# EAGLE board CT_schematic (EAGLE 7.6.0)

Size 100 x 80 mm. Coordinates in mm from the lower left corner, seen from the top.
Outline: 0,0 100,0 100,80 0,80 0,0
Copper layers (1*16): Top 0.035mm / dielectric 1.5mm / Bottom 0.035mm
Design rules "default": minimum track width 10mil, minimum drill 24mil, track to track 8mil, track to pad 8mil, pad to pad 8mil, via to via 8mil, smd to smd 8mil, copper to edge 40mil, drill to drill 8mil, minimum pad ring 10mil, minimum via ring 8mil, stop-mask expansion 4mil, vias tented up to drill 0mil, thermal gap 10mil

## Footprints (pad centres in the part's own frame; a part is rotated, then mirrored left to right if it is on the bottom)
C0603 = smd 0.8 x 0.8: 1 -0.762,0; 2 0.762,0
C0402 = smd 0.5 x 0.5: 1 -0.508,0; 2 0.508,0
C1210 = smd 1.2 x 2.5: 1 -1.524,0; 2 1.524,0
C0805 = smd 1.2 x 1.3: 1 -1.016,0; 2 1.016,0
C1206 = smd 1.3 x 1.6: 1 -1.524,0; 2 1.524,0
DR1040 = smd 1.6 x 3.2: 1 -4.458,0; 2 4.458,0
R0603 = smd 0.8 x 0.8: 1 -0.762,0; 2 0.762,0
UFBGA132 = smd 0.32 x 0.32: A1 -2.75,2.75; A2 -2.25,2.75; A3 -1.75,2.75; A4 -1.25,2.75; A5 -0.75,2.75; A6 -0.25,2.75; A7 0.25,2.75; A8 0.75,2.75; A9 1.25,2.75; A10 1.75,2.75; A11 2.25,2.75; A12 2.75,2.75; B1 -2.75,2.25; B2 -2.25,2.25; B3 -1.75,2.25; B4 -1.25,2.25; B5 -0.75,2.25; B6 -0.25,2.25; B7 0.25,2.25; B8 0.75,2.25; B9 1.25,2.25; B10 1.75,2.25; B11 2.25,2.25; B12 2.75,2.25; C1 -2.75,1.75; C2 -2.25,1.75; C3 -1.75,1.75; C4 -1.25,1.75; C5 -0.75,1.75; C6 -0.25,1.75; C7 0.25,1.75; C8 0.75,1.75; C9 1.25,1.75; C10 1.75,1.75; C11 2.25,1.75; C12 2.75,1.75; D1 -2.75,1.25; D2 -2.25,1.25; D3 -1.75,1.25; D4 -1.25,1.25; D5 -0.75,1.25; D6 -0.25,1.25; D7 0.25,1.25; D8 0.75,1.25; D9 1.25,1.25; D10 1.75,1.25; D11 2.25,1.25; D12 2.75,1.25; E1 -2.75,0.75; E2 -2.25,0.75; E3 -1.75,0.75; E4 -1.25,0.75; E9 1.25,0.75; E10 1.75,0.75; E11 2.25,0.75; E12 2.75,0.75; F1 -2.75,0.25; F2 -2.25,0.25; F3 -1.75,0.25; F4 -1.25,0.25; F6 -0.25,0.25; F7 0.25,0.25; F9 1.25,0.25; F10 1.75,0.25; F11 2.25,0.25; F12 2.75,0.25; G1 -2.75,-0.25; G2 -2.25,-0.25; G3 -1.75,-0.25; G4 -1.25,-0.25; G6 -0.25,-0.25; G7 0.25,-0.25; G9 1.25,-0.25; G10 1.75,-0.25; G11 2.25,-0.25; G12 2.75,-0.25; H1 -2.75,-0.75; H2 -2.25,-0.75; H3 -1.75,-0.75; H4 -1.25,-0.75; H9 1.25,-0.75; H10 1.75,-0.75; H11 2.25,-0.75; H12 2.75,-0.75; J1 -2.75,-1.25; J2 -2.25,-1.25; J3 -1.75,-1.25; J4 -1.25,-1.25; J5 -0.75,-1.25; J6 -0.25,-1.25; J7 0.25,-1.25; J8 0.75,-1.25; J9 1.25,-1.25; J10 1.75,-1.25; J11 2.25,-1.25; J12 2.75,-1.25; K1 -2.75,-1.75; K2 -2.25,-1.75; K3 -1.75,-1.75; K4 -1.25,-1.75; K5 -0.75,-1.75; K6 -0.25,-1.75; K7 0.25,-1.75; K8 0.75,-1.75; K9 1.25,-1.75; K10 1.75,-1.75; K11 2.25,-1.75; K12 2.75,-1.75; L1 -2.75,-2.25; L2 -2.25,-2.25; L3 -1.75,-2.25; L4 -1.25,-2.25; L5 -0.75,-2.25; L6 -0.25,-2.25; L7 0.25,-2.25; L8 0.75,-2.25; L9 1.25,-2.25; L10 1.75,-2.25; L11 2.25,-2.25; L12 2.75,-2.25; M1 -2.75,-2.75; M2 -2.25,-2.75; M3 -1.75,-2.75; M4 -1.25,-2.75; M5 -0.75,-2.75; M6 -0.25,-2.75; M7 0.25,-2.75; M8 0.75,-2.75; M9 1.25,-2.75; M10 1.75,-2.75; M11 2.25,-2.75; M12 2.75,-2.75
VFBGA-63 = smd 0.4 x 0.4: A1 -3.6,4.4; A2 -2.8,4.4; A9 2.8,4.4; A10 3.6,4.4; B1 -3.6,3.6; B9 2.8,3.6; B10 3.6,3.6; C3 -2,2.8; C4 -1.2,2.8; C5 -0.4,2.8; C6 0.4,2.8; C7 1.2,2.8; C8 2,2.8; D3 -2,2; D4 -1.2,2; D5 -0.4,2; D6 0.4,2; D7 1.2,2; D8 2,2; E3 -2,1.2; E4 -1.2,1.2; E5 -0.4,1.2; E6 0.4,1.2; E7 1.2,1.2; E8 2,1.2; F3 -2,0.4; F4 -1.2,0.4; F5 -0.4,0.4; F6 0.4,0.4; F7 1.2,0.4; F8 2,0.4; G3 -2,-0.4; G4 -1.2,-0.4; G5 -0.4,-0.4; G6 0.4,-0.4; G7 1.2,-0.4; G8 2,-0.4; H3 -2,-1.2; H4 -1.2,-1.2; H5 -0.4,-1.2; H6 0.4,-1.2; H7 1.2,-1.2; H8 2,-1.2; J3 -2,-2; J4 -1.2,-2; J5 -0.4,-2; J6 0.4,-2; J7 1.2,-2; J8 2,-2; K3 -2,-2.8; K4 -1.2,-2.8; K5 -0.4,-2.8; K6 0.4,-2.8; K7 1.2,-2.8; K8 2,-2.8; L1 -3.6,-3.6; L2 -2.8,-3.6; L9 2.8,-3.6; L10 3.6,-3.6; M1 -3.6,-4.4; M2 -2.8,-4.4; M9 2.8,-4.4; M10 3.6,-4.4
TSSOP20-I = smd 0.4 x 1.35: 1 -2.925,-2.875; 2 -2.275,-2.875; 3 -1.625,-2.875; 4 -0.975,-2.875; 5 -0.325,-2.875; 6 0.325,-2.875; 7 0.975,-2.875; 8 1.625,-2.875; 9 2.275,-2.875; 10 2.925,-2.875; 11 2.925,2.875; 12 2.275,2.875; 13 1.625,2.875; 14 0.975,2.875; 15 0.325,2.875; 16 -0.325,2.875; 17 -0.975,2.875; 18 -1.625,2.875; 19 -2.275,2.875; 20 -2.925,2.875
182-009-MALE = drill 1.194 pad 1.524 octagon: 1 -5.537,10.923; 2 -2.769,10.923; 3 0,10.923; 4 2.769,10.923; 5 5.537,10.923; 6 -4.153,8.08; 7 -1.384,8.08; 8 1.384,8.08; 9 4.153,8.08 | hole 3.048: -12.446,9.501; 12.446,9.501
QFN65P400X400X100-17N = smd 1.016 x 0.356: 1 -1.803,0.965; 2 -1.803,0.33; 3 -1.803,-0.33; 4 -1.803,-0.965; 9 1.803,-0.965; 10 1.803,-0.33; 11 1.803,0.33; 12 1.803,0.965 | smd 0.356 x 1.016: 5 -0.965,-1.803; 6 -0.33,-1.803; 7 0.33,-1.803; 8 0.965,-1.803; 13 0.965,1.803; 14 0.33,1.803; 15 -0.33,1.803; 16 -0.965,1.803 | smd 2.108 x 2.108: 17 0,0
HTSS-105-01-G-D = drill 1 pad 1.8 square: 1 0,0 | drill 1 pad 1.8: 2 0,2.54; 3 2.54,0; 4 2.54,2.54; 5 5.08,0; 6 5.08,2.54; 7 7.62,0; 8 7.62,2.54; 9 10.16,0; 10 10.16,2.54
QFN-28 = smd 0.813 x 0.305: 1 -2.451,1.5; 2 -2.451,1; 3 -2.451,0.5; 4 -2.451,0; 5 -2.451,-0.5; 6 -2.451,-1; 7 -2.451,-1.5; 15 2.451,-1.5; 16 2.451,-1; 17 2.451,-0.5; 18 2.451,0; 19 2.451,0.5; 20 2.451,1; 21 2.451,1.5 | smd 0.305 x 0.813: 8 -1.5,-2.451; 9 -1,-2.451; 10 -0.5,-2.451; 11 0,-2.451; 12 0.5,-2.451; 13 1,-2.451; 14 1.5,-2.451; 22 1.5,2.451; 23 1,2.451; 24 0.5,2.451; 25 0,2.451; 26 -0.5,2.451; 27 -1,2.451; 28 -1.5,2.451 | smd 3.607 x 3.607: 29 0,0
SJ-43515TS-SMT-TR = smd 2.2 x 3: 1 0.6,-7.4; 4 3.4,-7.4 | smd 3 x 3: 2 12.8,-7.4; 5 17,-3 | smd 2 x 3: 3 5.3,0; 6 2.5,0 | drill 1.8: P$7 4.5,-3.69; P$8 11.54,-3.69
ABS07-32.768KHZ-7-T = smd 1.1 x 2.4: 1 -2.5,0; 2 0,0
ABLS-25.000MHZ-B2F-T = smd 5.6 x 2.8: 1 -3.81,0; 2 5.69,0
ASFL1 = smd 1.7 x 1.5: 1 -1.27,-1.1; 2 1.27,-1.1; 3 1.27,1.1; 4 -1.27,1.1
TSOT-23-5 = smd 1.3 x 0.62: 1 -1.31,0.95; 2 -1.31,0; 3 -1.31,-0.95; 4 1.31,-0.95; 5 1.31,0.95
SOIC-8_EP = smd 1.6 x 0.533: 1 -2.921,1.905; 2 -2.921,0.635; 3 -2.921,-0.635; 4 -2.921,-1.905; 5 2.921,-1.905; 6 2.921,-0.635; 7 2.921,0.635; 8 2.921,1.905 | smd 2.54 x 3.302: EPAD 0,0 | drill 0.406 pad 0.406: P$1 -0.508,0.635; P$2 0.381,0.635; P$3 -0.508,-0.635; P$4 0.381,-0.635
DFN8_2X3MC = smd 0.813 x 0.305: 1 -1.398,0.75; 2 -1.398,0.25; 3 -1.398,-0.25; 4 -1.398,-0.75; 5 1.398,-0.75; 6 1.398,-0.25; 7 1.398,0.25; 8 1.398,0.75 | smd 1.753 x 1.549: 9 0,0
JST-2-SMD = smd 1 x 4.6: 1 -1,-3.7; 2 1,-3.7 | smd 1.6 x 3.4: NC1 -3.4,1.5; NC2 3.4,1.5
FCI_10118193-0001LF = smd 0.4 x 1.35: 1 -1.3,2.675; 2 -0.65,2.675; 3 0,2.675; 4 0.65,2.675; 5 1.3,2.675 | smd 1.6 x 1.4: 6 -3.2,2.45; 7 3.2,2.45 | smd 1.9 x 1.9: 8 -1.2,0; 9 1.2,0 | hole 0.5: -3.3,0; 3.3,0
SON-6 = smd 0.55 x 0.3: 1 -0.355,0.5 | smd 0.52 x 0.3: 2 -0.37,0; 3 -0.37,-0.5; 4 0.37,-0.5; 5 0.37,0; 6 0.37,0.5
SW_4-1437565-2 = smd 1.4 x 2.1: 1 -2.23,4.55; 2 -2.23,-4.55; 3 2.23,4.55; 4 2.23,-4.55
LGM67K-G1J2-24-Z = smd 0.8 x 1.4: A -2,0; C 0,0
NC7SZ125M5X = smd 1.3 x 0.7: 1 -1.3,0.95; 2 -1.3,0; 3 -1.3,-0.95; 4 1.3,-0.95; 5 1.3,0.95

## Placement (x,y rotation side)
C1  1e-06  [C0603]  -52.07,81.28 0 top  (outside the outline)
C2  1e-07  [C0603]  -55.88,81.28 0 top  (outside the outline)
C3  1e-07  [C0603]  -59.69,81.28 0 top  (outside the outline)
C4  1e-07  [C0603]  -63.5,81.28 0 top  (outside the outline)
C5  1e-07  [C0603]  -67.31,81.28 0 top  (outside the outline)
C6  1e-07  [C0603]  -71.12,81.28 0 top  (outside the outline)
C7  1e-07  [C0603]  -74.93,81.28 0 top  (outside the outline)
C8  1e-07  [C0603]  -78.74,81.28 0 top  (outside the outline)
C9  1e-07  [C0603]  -82.55,81.28 0 top  (outside the outline)
C10  4.7e-06  [C0603]  -44.45,81.28 0 top  (outside the outline)
C11  1e-07  [C0603]  -86.36,81.28 0 top  (outside the outline)
C12  1e-07  [C0603]  -15.24,86.36 0 top  (outside the outline)
C13  1e-08  [C0603]  -19.05,86.36 0 top  (outside the outline)
C14  1e-06  [C0603]  -22.86,86.36 0 top  (outside the outline)
C15  1e-11  [C0402]  -57.15,86.36 0 top  (outside the outline)
C16  1e-11  [C0402]  -60.96,86.36 0 top  (outside the outline)
C17  1e-11  [C0402]  -64.77,86.36 0 top  (outside the outline)
C18  1e-11  [C0402]  -68.58,86.36 0 top  (outside the outline)
C19  1e-07  [C0402]  -72.39,86.36 0 top  (outside the outline)
C20  1e-07  [C0402]  -76.2,86.36 0 top  (outside the outline)
C21  1e-07  [C0402]  -80.01,86.36 0 top  (outside the outline)
C22  1e-07  [C0402]  -83.82,86.36 0 top  (outside the outline)
C23  2.2e-06  [C0603]  -48.26,81.28 0 top  (outside the outline)
C24  1e-07  [C0402]  -87.63,86.36 0 top  (outside the outline)
C25  1e-07  [C0402]  -15.24,91.44 0 top  (outside the outline)
C26  1e-07  [C0402]  -19.05,91.44 0 top  (outside the outline)
C27  1e-07  [C0402]  -22.86,91.44 0 top  (outside the outline)
C28  1e-07  [C0402]  -26.67,91.44 0 top  (outside the outline)
C29  1e-07  [C0402]  -30.48,91.44 0 top  (outside the outline)
C30  1e-07  [C0402]  -34.29,91.44 0 top  (outside the outline)
C31  1e-07  [C0402]  -38.1,91.44 0 top  (outside the outline)
C32  1e-06  [C0603]  -26.67,86.36 0 top  (outside the outline)
C33  2.2e-05  [C1210]  -66.04,62.23 0 top  (outside the outline)
C34  2.2e-05  [C1210]  -72.39,62.23 0 top  (outside the outline)
C35  1e-09  [C0402]  -41.91,91.44 0 top  (outside the outline)
C36  1e-09  [C0402]  -45.72,91.44 0 top  (outside the outline)
C37  1e-07  [C0402]  -49.53,91.44 0 top  (outside the outline)
C38  1e-07  [C0402]  -53.34,91.44 0 top  (outside the outline)
C39  1e-07  [C0402]  -57.15,91.44 0 top  (outside the outline)
C40  1e-07  [C0402]  -60.96,91.44 0 top  (outside the outline)
C41  1e-07  [C0402]  -64.77,91.44 0 top  (outside the outline)
C42  1e-05  [C0805]  -46.99,69.85 0 top  (outside the outline)
C43  1e-05  [C0805]  -52.07,69.85 0 top  (outside the outline)
C44  1e-05  [C0805]  -57.15,69.85 0 top  (outside the outline)
C45  1e-05  [C0805]  -62.23,69.85 0 top  (outside the outline)
C46  1e-05  [C0805]  -67.31,69.85 0 top  (outside the outline)
C47  1e-08  [C0402]  -68.58,91.44 0 top  (outside the outline)
C48  1e-05  [C0805]  -72.39,69.85 0 top  (outside the outline)
C49  1e-05  [C0805]  -77.47,69.85 0 top  (outside the outline)
C50  1e-05  [C1210]  -78.74,62.23 0 top  (outside the outline)
C51  1e-05  [C1210]  -85.09,62.23 0 top  (outside the outline)
C52  1e-05  [C1210]  -16.51,69.85 0 top  (outside the outline)
C53  1e-05  [C1210]  -22.86,69.85 0 top  (outside the outline)
C54  1e-07  [C0402]  -72.39,91.44 0 top  (outside the outline)
C55  1e-05  [C1206]  -29.21,69.85 0 top  (outside the outline)
C56  1e-05  [C1206]  -35.56,69.85 0 top  (outside the outline)
C57  1e-08  [C0402]  -76.2,91.44 0 top  (outside the outline)
I1  7e-06  [DR1040]  -69.85,41.91 0 top  (outside the outline)
R2  1000.0  [R0603]  -30.48,86.36 0 top  (outside the outline)
R4  4700.0  [R0603]  -34.29,86.36 0 top  (outside the outline)
R6  2200.0  [R0603]  -38.1,86.36 0 top  (outside the outline)
R7  10000.0  [R0603]  -44.45,76.2 0 top  (outside the outline)
R8  10000.0  [R0603]  -49.53,76.2 0 top  (outside the outline)
R9  10000.0  [R0603]  -54.61,76.2 0 top  (outside the outline)
R10  10000.0  [R0603]  -59.69,76.2 0 top  (outside the outline)
R11  10000.0  [R0603]  -64.77,76.2 0 top  (outside the outline)
R12  10000.0  [R0603]  -69.85,76.2 0 top  (outside the outline)
R13  10000.0  [R0603]  -74.93,76.2 0 top  (outside the outline)
R14  10000.0  [R0603]  -80.01,76.2 0 top  (outside the outline)
R15  47.0  [R0603]  -41.91,86.36 0 top  (outside the outline)
R16  47000.0  [R0603]  -85.09,76.2 0 top  (outside the outline)
R17  47000.0  [R0603]  -15.24,81.28 0 top  (outside the outline)
R18  47000.0  [R0603]  -20.32,81.28 0 top  (outside the outline)
R19  680.0  [R0603]  -45.72,86.36 0 top  (outside the outline)
R20  490000.0  [R0603]  -29.21,76.2 0 top  (outside the outline)
R21  1000000.0  [R0603]  -24.13,76.2 0 top  (outside the outline)
R22  4031.5447154472  [R0603]  -19.05,76.2 0 top  (outside the outline)
R23  2200.0  [R0603]  -49.53,86.36 0 top  (outside the outline)
R24  10000.0  [R0603]  -25.4,81.28 0 top  (outside the outline)
R25  10000.0  [R0603]  -30.48,81.28 0 top  (outside the outline)
R26  82000.0  [R0603]  -35.56,81.28 0 top  (outside the outline)
R27  300000.0  [R0603]  -34.29,76.2 0 top  (outside the outline)
R28  120000.0  [R0603]  -39.37,76.2 0 top  (outside the outline)
R29  2000.0  [R0603]  -53.34,86.36 0 top  (outside the outline)
R30  10000.0  [R0603]  -40.64,81.28 0 top  (outside the outline)
U1  STM32L471QGI6  [UFBGA132]  -44.45,41.91 0 top  (outside the outline)
U2  mt29f4g08abbdah4  [VFBGA-63]  -73.66,27.94 0 top  (outside the outline)
U3  SP3203ECY-L/TR  [TSSOP20-I]  -59.69,41.91 0 top  (outside the outline)
U4  182-009-113R531  [182-009-MALE]  -36.83,6.35 0 top  (outside the outline)
U5  TSC2013QRSARQ1  [QFN65P400X400X100-17N]  -74.93,7.62 0 top  (outside the outline)
U6  HTSS-105-01-G-D  [HTSS-105-01-G-D]  -27.94,53.34 0 top  (outside the outline)
U7  WM8731CLSEFL  [QFN-28]  -58.42,63.5 0 top  (outside the outline)
U8  SJ-43515TS-SMT-TR  [SJ-43515TS-SMT-TR]  -39.37,31.75 0 top  (outside the outline)
U9  SJ-43515TS-SMT-TR  [SJ-43515TS-SMT-TR]  -67.31,31.75 0 top  (outside the outline)
U10  ABS07-32.768KHZ-7-T  [ABS07-32.768KHZ-7-T]  -27.94,63.5 0 top  (outside the outline)
U11  ABLS-25.000MHZ-B2F-T  [ABLS-25.000MHZ-B2F-T]  -77.47,53.34 0 top  (outside the outline)
U12  ASFL1-12.288MHZ-EC-T  [ASFL1]  -49.53,53.34 0 top  (outside the outline)
U13  ltc3406es5  [TSOT-23-5]  -82.55,68.58 0 top  (outside the outline)
U14  MIC5234YME  [SOIC-8_EP]  -36.83,62.23 0 top  (outside the outline)
U15  MCP73831T-2ACI/MC  [DFN8_2X3MC]  -85.09,90.17 0 top  (outside the outline)
U16  S2B-PH-SM4-TB(LF)(SN)  [JST-2-SMD]  -85.09,43.18 0 top  (outside the outline)
U17  10118193-0001LF  [FCI_10118193-0001LF]  -58.42,53.34 0 top  (outside the outline)
U18  TPS3895ADRYR  [SON-6]  -78.74,90.17 0 top  (outside the outline)
U19  4-1437565-2  [SW_4-1437565-2]  -27.94,43.18 0 top  (outside the outline)
U20  Q65110A2395  [LGM67K-G1J2-24-Z]  -45.72,63.5 0 top  (outside the outline)
U21  nc7sz125m5x  [NC7SZ125M5X]  -40.64,69.85 0 top  (outside the outline)

## Library data of the parts
C1-C57 I1 R2 R4 R6-R30 U1-U21 = circuit_tree

## Nets
CLK_CRYSTAL_U1_D1: C15.1 U1.D1 U10.1
CLK_CRYSTAL_U1_E1: C16.1 U1.E1 U10.2
CLK_CRYSTAL_U1_F1: C17.1 U1.F1 U11.1
CLK_CRYSTAL_U1_G1: C18.1 U1.G1 U11.2
CLK_U7_1: U7.1 U12.3
GND: C1.2 C2.2 C3.2 C4.2 C5.2 C6.2 C7.2 C8.2 C9.2 C10.2 C11.2 C12.2 C13.2 C14.2 C15.2 C16.2 C17.2 C18.2 C19.2 C20.2 C21.2 C22.2 C23.2 C24.2 C25.2 C28.2 C29.2 C36.2 C37.2 C38.2 C39.2 C40.2 C41.2 C42.2 C43.2 C44.2 C45.2 C46.2 C47.2 C48.2 C49.1 C49.2 C50.2 C51.2 C52.2 C53.2 C54.2 C55.2 C56.2 C57.2 R2.2 R7.2 R16.2 R17.2 R18.2 R20.2 R23.2 R26.2 R28.2 R29.2 U1.D3 U1.E3 U1.F2 U1.F6 U1.F7 U1.F11 U1.F12 U1.J1 U2.C5 U2.F7 U2.K3 U2.K8 U3.18 U4.5 U5.17 U6.9 U7.4 U7.15 U7.19 U7.25 U7.26 U7.29 U8.1 U9.1 U12.2 U13.2 U14.7 U14.EPAD U15.6 U15.9 U16.2 U17.5 U17.6 U17.7 U17.8 U17.9 U18.2 U20.C U21.1 U21.3
INPUT_USBPOWER_5V: C55.1 R30.2 U15.1 U15.2 U17.1
NET_U1_A4: R7.1 U1.A4
NET_U1_B3: R6.1 U1.B3 U5.1
NET_U1_H2: R4.1 U1.H2 U21.4
NET_U1_M11: U20.A
NET_U1_M12: U19.3 U19.4
NET_U2_C3: R12.1 U2.C3
NET_U3_1: C26.1 U3.1
NET_U3_2: C28.1 U3.2
NET_U3_3: C26.2 U3.3
NET_U3_4: C27.1 U3.4
NET_U3_5: C27.2 U3.5
NET_U3_6: C29.1 U3.6
NET_U3_20: U3.20
NET_U4_2: U3.14 U4.2
NET_U4_3: U3.17 U4.3
NET_U4_7: U3.13 U4.7
NET_U4_8: U3.16 U4.8
NET_U5_4: R14.1 U5.4
NET_U5_5: R13.1 U5.5
NET_U5_9: C30.2 C31.2 C32.2 R15.2 U5.9
NET_U5_15: R15.1 U5.8 U5.15
NET_U6_3: U5.12 U6.3
NET_U6_4: U5.14 U6.4
NET_U6_5: U5.11 U6.5
NET_U6_6: U5.13 U6.6
NET_U7_9: U7.9
NET_U7_20: C41.1 C46.1 U7.20
NET_U8_2: C34.1 R17.1 U8.2
NET_U8_5: C33.1 R16.1 U8.5
NET_U8_13: C33.2
NET_U8_14: C34.2
NET_U9_5: C35.1 C36.1 R18.1 R19.1 U9.5
NET_U9_21: R19.2
NET_U9_22: C35.2
NET_U13_1: U13.1
NET_U13_3: I1.1 U13.3
NET_U13_5: R20.1 R21.1 U13.5
NET_U13_ATNET_3: I1.2 R21.2
NET_U14_4: R22.2 R23.1 U14.4
NET_U15_5: R30.1 U15.5
NET_U15_8: R29.1 U15.8
NET_U18_1: R25.1 R26.1 U18.1
NET_U18_3: R27.2 R28.1 U18.3
NET_U18_4: R24.1 U18.4 U21.2
NET_U19_1: R2.1 U19.1 U19.2
PROC_FMC_A16: U1.J11 U2.D5
PROC_FMC_A17: U1.J10 U2.C4
PROC_FMC_D0: U1.H11 U2.H4
PROC_FMC_D1: U1.H10 U2.J4
PROC_FMC_D2: U1.C9 U2.K4
PROC_FMC_D3: U1.B9 U2.K5
PROC_FMC_D4: U1.M7 U2.K6
PROC_FMC_D5: U1.L7 U2.J7
PROC_FMC_D6: U1.M8 U2.K7
PROC_FMC_D7: U1.L8 U2.J8
PROC_FMC_INT3: R8.1 U1.H4 U2.C8
PROC_FMC_NCE3: R9.1 U1.D9 U2.C6
PROC_FMC_NOE: R11.1 U1.B7 U2.D4
PROC_FMC_NWE: R10.1 U1.A6 U2.C7
PROC_LPUART1_CTS: U1.E9 U3.8
PROC_LPUART1_RTS: U1.G4 U3.10
PROC_LPUART1_RX: U1.H1 U3.11
PROC_LPUART1_TX: U1.J2 U3.7
PROC_SAI1_FS_A: U1.B1 U7.9 U7.11
PROC_SAI1_SCK_A: U1.C2 U7.7
PROC_SAI1_SD_A: U1.B6 U7.8
VCC_S1_3V7: C48.1 C50.1 C51.1 C56.1 U13.4 U14.5 U14.8 U15.3 U15.4 U16.1
VCC_TIER1_1V8: C1.1 C2.1 C3.1 C4.1 C5.1 C6.1 C7.1 C8.1 C9.1 C10.1 C11.1 C12.1 C19.1 C20.1 C21.1 C22.1 C23.1 C25.1 C30.1 C37.1 C38.1 C39.1 C40.1 C42.1 C43.1 C44.1 C45.1 C49.2 C54.1 C57.1 I1.2 R4.2 R6.2 R8.2 R9.2 R10.2 R11.2 R12.2 R13.2 R14.2 R21.2 R24.2 R25.2 R27.1 U1.C4 U1.C11 U1.E2 U1.G2 U1.G6 U1.G7 U1.G11 U1.G12 U1.H3 U2.D3 U2.G4 U2.H8 U2.J6 U3.12 U5.7 U7.3 U7.5 U7.12 U7.18 U18.6 U21.5
VCC_TIER1_3V3: C13.1 C14.1 C24.1 C31.1 C32.1 C47.1 C52.1 C53.1 R22.1 U1.L1 U1.M1 U3.19 U5.10 U12.4 U14.1

## Tracks (layer width: path | path; a pad name or v marks a point on that pad's centre or on a via)
CLK_CRYSTAL_U1_D1  (2 unrouted)
CLK_CRYSTAL_U1_E1  (2 unrouted)
CLK_CRYSTAL_U1_F1  (2 unrouted)
CLK_CRYSTAL_U1_G1  (2 unrouted)
CLK_U7_1  (1 unrouted)
GND  (99 unrouted)
INPUT_USBPOWER_5V  (4 unrouted)
NET_U1_A4  (1 unrouted)
NET_U1_B3  (2 unrouted)
NET_U1_H2  (2 unrouted)
NET_U1_M12  (1 unrouted)
NET_U2_C3  (1 unrouted)
NET_U3_1  (1 unrouted)
NET_U3_2  (1 unrouted)
NET_U3_3  (1 unrouted)
NET_U3_4  (1 unrouted)
NET_U3_5  (1 unrouted)
NET_U3_6  (1 unrouted)
NET_U4_2  (1 unrouted)
NET_U4_3  (1 unrouted)
NET_U4_7  (1 unrouted)
NET_U4_8  (1 unrouted)
NET_U5_4  (1 unrouted)
NET_U5_5  (1 unrouted)
NET_U5_9  (4 unrouted)
NET_U5_15  (2 unrouted)
NET_U6_3  (1 unrouted)
NET_U6_4  (1 unrouted)
NET_U6_5  (1 unrouted)
NET_U6_6  (1 unrouted)
NET_U7_20  (2 unrouted)
NET_U8_2  (2 unrouted)
NET_U8_5  (2 unrouted)
NET_U9_5  (4 unrouted)
NET_U13_3  (1 unrouted)
NET_U13_5  (2 unrouted)
NET_U13_ATNET_3  (1 unrouted)
NET_U14_4  (2 unrouted)
NET_U15_5  (1 unrouted)
NET_U15_8  (1 unrouted)
NET_U18_1  (2 unrouted)
NET_U18_3  (2 unrouted)
NET_U18_4  (2 unrouted)
NET_U19_1  (2 unrouted)
PROC_FMC_A16  (1 unrouted)
PROC_FMC_A17  (1 unrouted)
PROC_FMC_D0  (1 unrouted)
PROC_FMC_D1  (1 unrouted)
PROC_FMC_D2  (1 unrouted)
PROC_FMC_D3  (1 unrouted)
PROC_FMC_D4  (1 unrouted)
PROC_FMC_D5  (1 unrouted)
PROC_FMC_D6  (1 unrouted)
PROC_FMC_D7  (1 unrouted)
PROC_FMC_INT3  (2 unrouted)
PROC_FMC_NCE3  (2 unrouted)
PROC_FMC_NOE  (2 unrouted)
PROC_FMC_NWE  (2 unrouted)
PROC_LPUART1_CTS  (1 unrouted)
PROC_LPUART1_RTS  (1 unrouted)
PROC_LPUART1_RX  (1 unrouted)
PROC_LPUART1_TX  (1 unrouted)
PROC_SAI1_FS_A  (2 unrouted)
PROC_SAI1_SCK_A  (1 unrouted)
PROC_SAI1_SD_A  (1 unrouted)
VCC_S1_3V7  (9 unrouted)
VCC_TIER1_1V8  (64 unrouted)
VCC_TIER1_3V3  (14 unrouted)